# Altium PCB role after.PcbDoc (part 1 of 2)
Units mm, origin at the board's own origin, x right, y up, seen from the top; angles counter-clockwise.
Board outline 425.96 x 184.94 mm, 2 copper layers (Top Layer, Bottom Layer); 206 components, 164 nets, 532 pads, 4 vias.
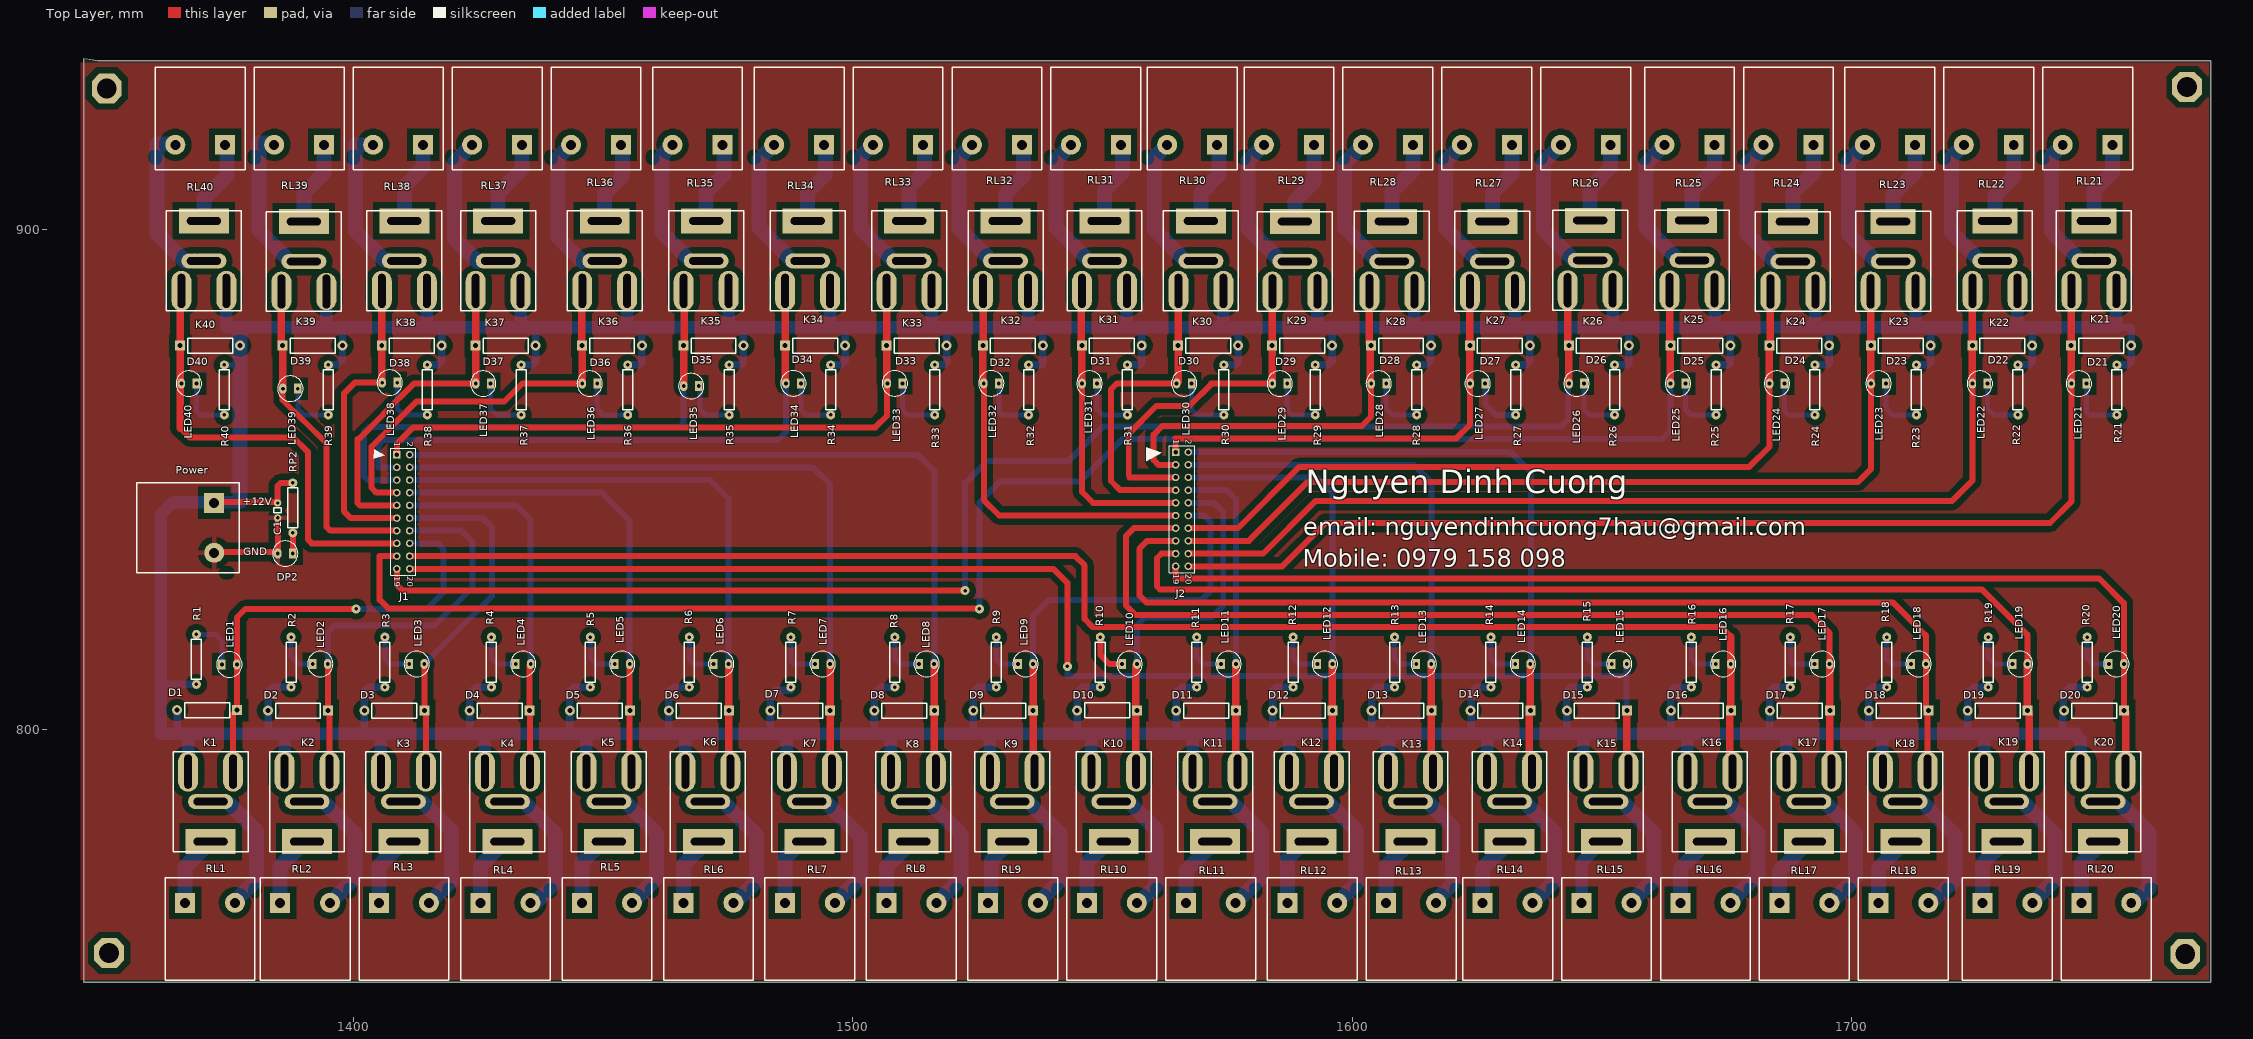
[diagram p0: Top Layer view]
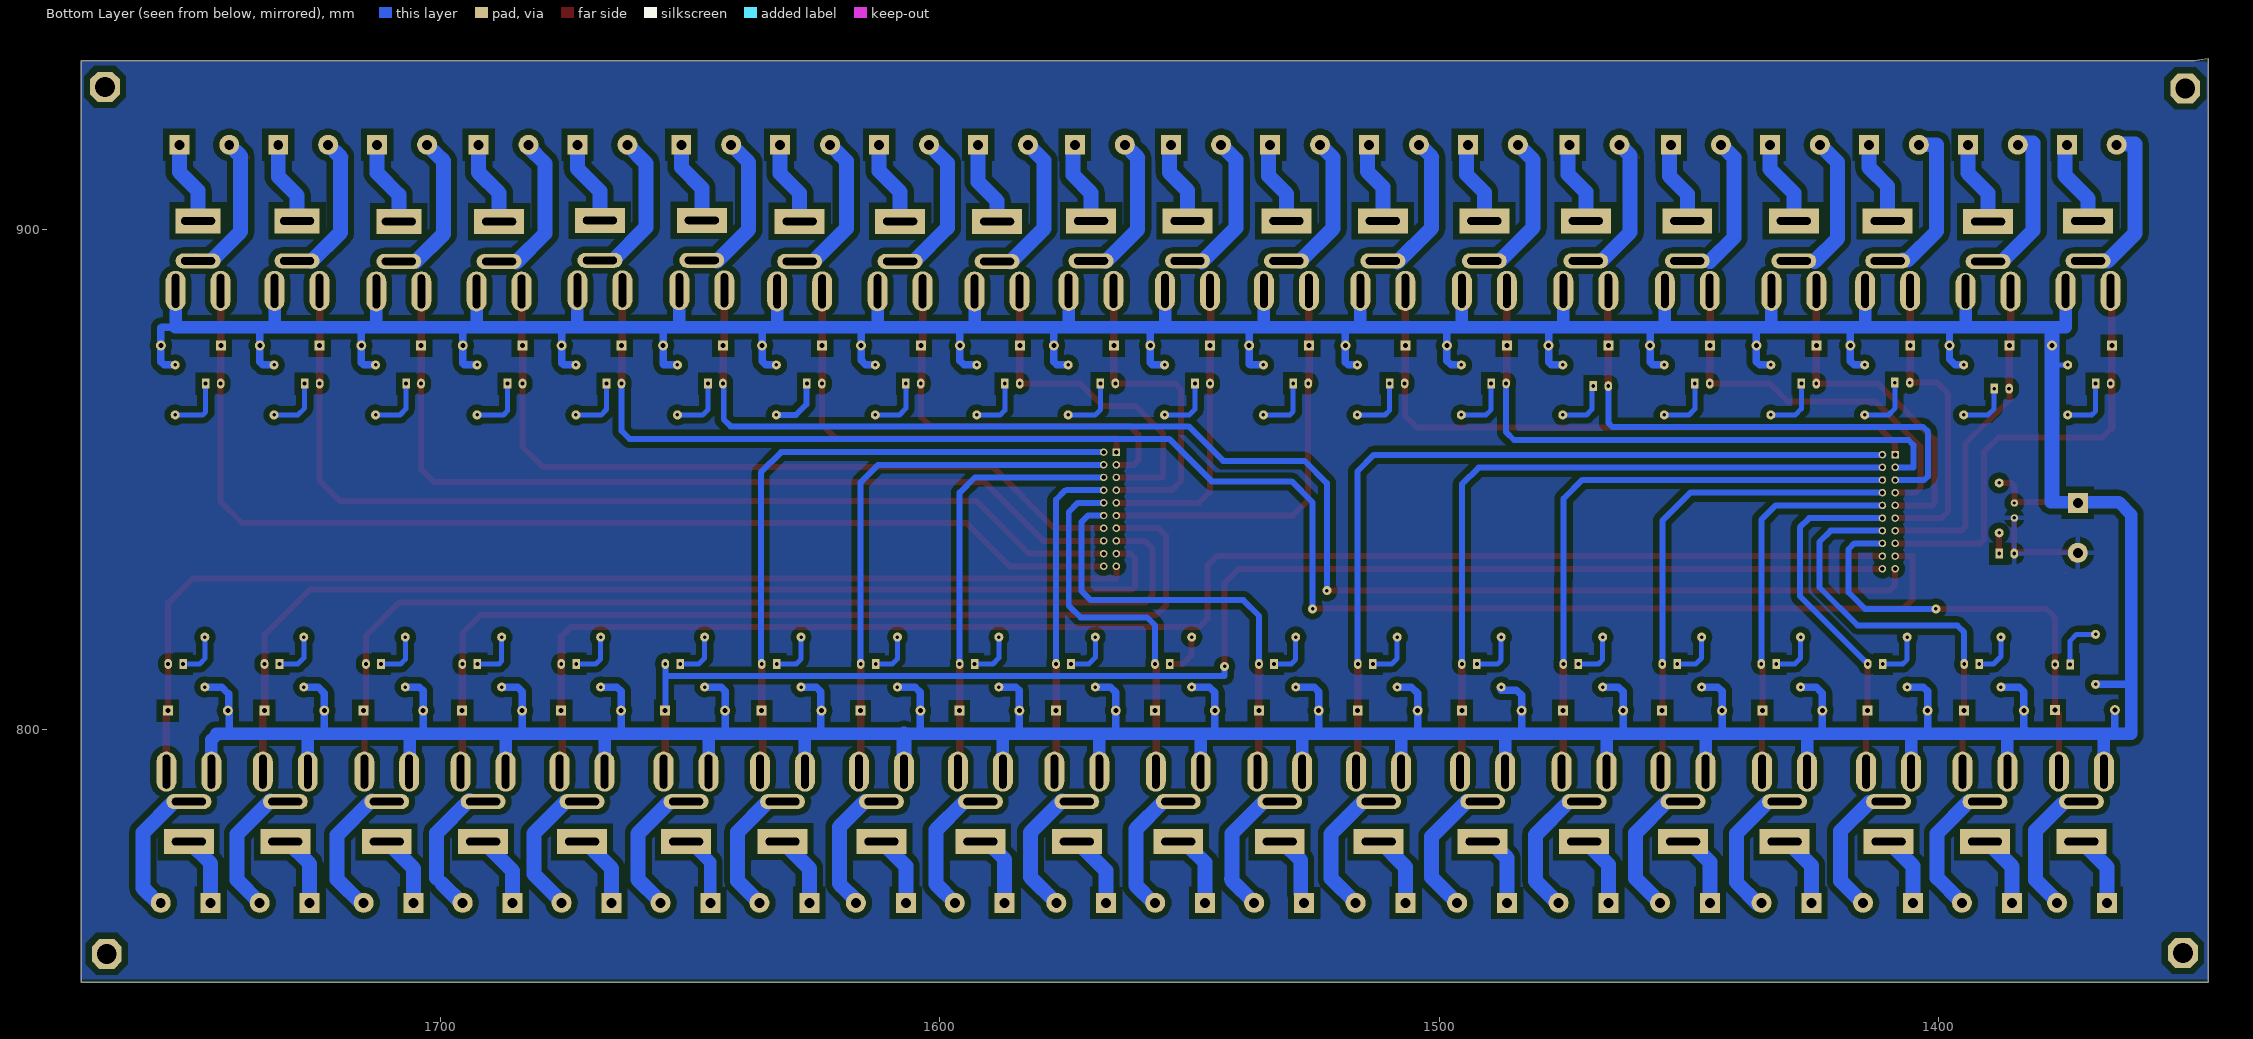
[diagram p1: Bottom Layer view, seen from below]

## Layer stack, top to bottom
Top Layer: signal copper 0.0356
Dielectric: dielectric 0.32, FR-4, Dk 4.8
Bottom Layer: signal copper 0.0356

## Board outline
1348.765,933.831 1771.955,933.831 1771.955,749.351 1345.997,749.351 1345.997,934.288

## Design rules (kind name [scope] priority, off if disabled: settings)
Clearance [All] p1: gap=1.2
ComponentClearance [All] p1: gap=0.254 collisioncheckmode=3 verticalgap=0.254
PlaneClearance [All] p1: clearance=1.2
PlaneConnect [All] p1: planeconnectstyle=Relief reliefexpansion=1 reliefentries=4 reliefconductorwidth=1 reliefairgap=1
PolygonConnect [All] p1: connectstyle=Relief reliefconductorwidth=1 reliefentries=4 polygonreliefangle="90 Angle"
RoutingVias [All] p1: holewidth=0.711 width=1.27 viastyle="Through Hole" minholewidth=0.711 minwidth=1.27 maxholewidth=0.711 maxwidth=1.27
SolderMaskExpansion [All] p1: expansion=0.102
TestPointUsage [All] p1: valid=0 allowmultiple=FALSE
Testpoint [All] p1: side=7 testpointundercomponent=TRUE minsize=1.016 maxsize=2.54 preferedsize=1.524 minholesize=0 maxholesize=1.016 preferedholesize=0.813 testpointgrid=0.025 style=1021 order=0-112345678
Width [All] p1: maxlimit=1.2 minlimit=1.2 preferedwidth=1.2
16 further rules are at their usual default settings.

## Components (designator, comment, footprint, x,y, rotation, side; value= is the part's Value field where it differs from the comment)
C1 "Cap" tu_gom 1384.808,843.28 r270 top
D1 "Diode" D_1A 1376.68,803.808 r180 top
D2 "Diode" D_1A 1394.884,803.702 r180 top
D3 "Diode" D_1A 1414.188,803.702 r180 top
D4 "Diode" D_1A 1435.266,803.702 r180 top
D5 "Diode" D_1A 1455.336,803.702 r180 top
D6 "Diode" D_1A 1475.148,803.702 r180 top
D7 "Diode" D_1A 1495.468,803.702 r180 top
D8 "Diode" D_1A 1516.296,803.702 r180 top
D9 "Diode" D_1A 1536.108,803.702 r180 top
D10 "Diode" D_1A 1556.92,803.732 r180 top
D11 "Diode" D_1A 1576.748,803.702 r180 top
D12 "Diode" D_1A 1596.052,803.702 r180 top
D13 "Diode" D_1A 1615.864,803.702 r180 top
D14 "Diode" D_1A 1635.676,803.702 r180 top
D15 "Diode" D_1A 1654.98,803.702 r180 top
D16 "Diode" D_1A 1675.808,803.702 r180 top
D17 "Diode" D_1A 1695.62,803.702 r180 top
D18 "Diode" D_1A 1715.432,803.702 r180 top
D19 "Diode" D_1A 1735.244,803.702 r180 top
D20 "Diode" D_1A 1754.548,803.702 r180 top
D21 "Diode" D_1A 1743.964,876.808 r0 top
D22 "Diode" D_1A 1724.152,876.808 r0 top
D23 "Diode" D_1A 1703.832,876.808 r0 top
D24 "Diode" D_1A 1683.512,876.808 r0 top
D25 "Diode" D_1A 1663.7,876.808 r0 top
D26 "Diode" D_1A 1643.38,876.808 r0 top
D27 "Diode" D_1A 1623.568,876.808 r0 top
D28 "Diode" D_1A 1603.756,876.808 r0 top
D29 "Diode" D_1A 1583.944,876.808 r0 top
D30 "Diode" D_1A 1565.148,876.808 r0 top
D31 "Diode" D_1A 1545.844,876.808 r0 top
D32 "Diode" D_1A 1526.032,876.808 r0 top
D33 "Diode" D_1A 1506.76,876.808 r0 top
D34 "Diode" D_1A 1486.44,876.808 r0 top
D35 "Diode" D_1A 1466.088,876.808 r0 top
D36 "Diode" D_1A 1445.768,876.808 r0 top
D37 "Diode" D_1A 1424.464,876.808 r0 top
D38 "Diode" D_1A 1405.66,876.808 r0 top
D39 "Diode" D_1A 1385.8,876.808 r0 top
D40 "Diode" D_1A 1365.278,876.808 r0 top
DP2 "LED0" LED_3 1386.84,835.152 r180 top
J1 "Header 10X2" HDR2X10 1408.684,854.964 r270 top (schematic designator M1)
J2 "Header 10X2" HDR2X10 1564.64,855.472 r270 top (schematic designator M2)
K1 "Relay-SPST" ROLE12V_JP#1 1366.886,789.988 r0 top
K2 "Relay-SPST" ROLE12V_JP#1 1386.19,789.988 r0 top
K3 "Relay-SPST" ROLE12V_JP#1 1405.494,789.988 r0 top
K4 "Relay-SPST" ROLE12V_JP#1 1426.322,789.988 r0 top
K5 "Relay-SPST" ROLE12V_JP#1 1446.642,789.988 r0 top
K6 "Relay-SPST" ROLE12V_JP#1 1466.454,789.988 r0 top
K7 "Relay-SPST" ROLE12V_JP#1 1486.774,789.988 r0 top
K8 "Relay-SPST" ROLE12V_JP#1 1507.602,789.988 r0 top
K9 "Relay-SPST" ROLE12V_JP#1 1527.414,789.988 r0 top
K10 "Relay-SPST" ROLE12V_JP#1 1547.734,789.988 r0 top
K11 "Relay-SPST" ROLE12V_JP#1 1568.054,789.988 r0 top
K12 "Relay-SPST" ROLE12V_JP#1 1587.358,789.988 r0 top
K13 "Relay-SPST" ROLE12V_JP#1 1607.17,789.988 r0 top
K14 "Relay-SPST" ROLE12V_JP#1 1626.982,789.988 r0 top
K15 "Relay-SPST" ROLE12V_JP#1 1646.286,789.988 r0 top
K16 "Relay-SPST" ROLE12V_JP#1 1667.114,789.988 r0 top
K17 "Relay-SPST" ROLE12V_JP#1 1686.926,789.988 r0 top
K18 "Relay-SPST" ROLE12V_JP#1 1706.23,789.988 r0 top
K19 "Relay-SPST" ROLE12V_JP#1 1726.55,789.988 r0 top
K20 "Relay-SPST" ROLE12V_JP#1 1745.854,789.988 r0 top
K21 "Relay-SPST" ROLE12V_JP#2 1753.006,889.258 r180 top
K22 "Relay-SPST" ROLE12V_JP#2 1733.194,889.258 r180 top
K23 "Relay-SPST" ROLE12V_JP#2 1712.818,889.152 r180 top
K24 "Relay-SPST" ROLE12V_JP#1 1692.726,889.136 r180 top
K25 "Relay-SPST" ROLE12V_JP#1 1672.538,889.378 r180 top
K26 "Relay-SPST" ROLE12V_JP#1 1652.14,889.386 r180 top
K27 "Relay-SPST" ROLE12V_JP#1 1632.54,889.16 r180 top
K28 "Relay-SPST" ROLE12V_JP#1 1612.426,889.174 r180 top
K29 "Relay-SPST" ROLE12V_JP#1 1593.01,889.144 r180 top
K30 "Relay-SPST" ROLE12V_JP#1 1574.19,889.258 r180 top
K31 "Relay-SPST" ROLE12V_JP#1 1554.886,889.258 r180 top
K32 "Relay-SPST" ROLE12V_JP#1 1535.074,889.258 r180 top
K33 "Relay-SPST" ROLE12V_JP#1 1515.77,889.258 r180 top
K34 "Relay-SPST" ROLE12V_JP#1 1495.45,889.258 r180 top
K35 "Relay-SPST" ROLE12V_JP#1 1475.13,889.258 r180 top
K36 "Relay-SPST" ROLE12V_JP#1 1454.81,889.258 r180 top
K37 "Relay-SPST" ROLE12V_JP#1 1433.474,889.258 r180 top
K38 "Relay-SPST" ROLE12V_JP#1 1414.678,889.258 r180 top
K39 "Relay-SPST" ROLE12V_JP#3 1394.568,889.136 r180 top
K40 "Relay-SPST" ROLE12V_JP#1 1374.546,889.258 r180 top
LED1 "LED0" LED_3 1374.648,812.952 r0 top
LED2 "LED0" LED_3 1392.852,813.051 r0 top
LED3 "LED0" LED_3 1412.156,813.051 r0 top
LED4 "LED0" LED_3 1433.492,813.051 r0 top
LED5 "LED0" LED_3 1453.304,813.051 r0 top
LED6 "LED0" LED_3 1473.116,813.051 r0 top
LED7 "LED0" LED_3 1493.436,813.051 r0 top
LED8 "LED0" LED_3 1514.264,813.051 r0 top
LED9 "LED0" LED_3 1534.076,813.051 r0 top
LED10 "LED0" LED_3 1554.904,813.051 r0 top
LED11 "LED0" LED_3 1574.716,813.051 r0 top
LED12 "LED0" LED_3 1594.02,813.051 r0 top
LED13 "LED0" LED_3 1613.832,813.051 r0 top
LED14 "LED0" LED_3 1633.644,813.051 r0 top
LED15 "LED0" LED_3 1652.948,813.051 r0 top
LED16 "LED0" LED_3 1673.776,813.051 r0 top
LED17 "LED0" LED_3 1693.588,813.051 r0 top
LED18 "LED0" LED_3 1712.892,813.051 r0 top
LED19 "LED0" LED_3 1733.212,813.051 r0 top
LED20 "LED0" LED_3 1752.516,813.051 r0 top
LED21 "LED0" LED_3 1745.996,869.188 r180 top
LED22 "LED0" LED_3 1726.184,869.188 r180 top
LED23 "LED0" LED_3 1705.864,869.188 r180 top
LED24 "LED0" LED_3 1685.544,869.188 r180 top
LED25 "LED0" LED_3 1665.732,869.188 r180 top
LED26 "LED0" LED_3 1645.412,869.188 r180 top
LED27 "LED0" LED_3 1625.6,869.188 r180 top
LED28 "LED0" LED_3 1605.788,869.188 r180 top
LED29 "LED0" LED_3 1585.976,869.188 r180 top
LED30 "LED0" LED_3 1566.82,869.238 r180 top
LED31 "LED0" LED_3 1547.876,869.188 r180 top
LED32 "LED0" LED_3 1528.212,869.238 r180 top
LED33 "LED0" LED_3 1508.908,869.238 r180 top
LED34 "LED0" LED_3 1488.588,869.238 r180 top
LED35 "LED0" LED_3 1468.12,868.68 r180 top
LED36 "LED0" LED_3 1447.8,869.188 r180 top
LED37 "LED0" LED_3 1426.464,869.188 r180 top
LED38 "LED0" LED_3 1407.744,869.378 r180 top
LED39 "LED0" LED_3 1387.856,868.172 r180 top
LED40 "LED0" LED_3 1367.536,869.188 r180 top
Power "Header 2" Header_nguon_20A 1372.108,845.312 r270 top
R1 "Res3" R_Nor 1368.552,813.968 r90 top
R2 "Res3" R_Nor 1387.492,813.431 r90 top
R3 "Res3" R_Nor 1406.288,813.431 r90 top
R4 "Res3" R_Nor 1427.624,813.431 r90 top
R5 "Res3" R_Nor 1447.436,813.431 r90 top
R6 "Res3" R_Nor 1467.248,813.431 r90 top
R7 "Res3" R_Nor 1487.568,813.431 r90 top
R8 "Res3" R_Nor 1508.396,813.431 r90 top
R9 "Res3" R_Nor 1528.716,813.431 r90 top
R10 "Res3" R_Nor 1549.544,813.431 r90 top
R11 "Res3" R_Nor 1568.848,813.431 r90 top
R12 "Res3" R_Nor 1588.152,813.431 r90 top
R13 "Res3" R_Nor 1608.472,813.431 r90 top
R14 "Res3" R_Nor 1627.776,813.431 r90 top
R15 "Res3" R_Nor 1647.08,813.431 r90 top
R16 "Res3" R_Nor 1667.908,813.431 r90 top
R17 "Res3" R_Nor 1687.72,813.431 r90 top
R18 "Res3" R_Nor 1707.024,813.431 r90 top
R19 "Res3" R_Nor 1727.344,813.431 r90 top
R20 "Res3" R_Nor 1747.156,813.431 r90 top
R21 "Res3" R_Nor 1753.108,867.918 r270 top
R22 "Res3" R_Nor 1733.296,867.918 r270 top
R23 "Res3" R_Nor 1712.976,867.918 r270 top
R24 "Res3" R_Nor 1692.656,867.918 r270 top
R25 "Res3" R_Nor 1672.844,867.918 r270 top
R26 "Res3" R_Nor 1652.524,867.918 r270 top
R27 "Res3" R_Nor 1632.712,867.918 r270 top
R28 "Res3" R_Nor 1612.9,867.918 r270 top
R29 "Res3" R_Nor 1592.58,867.918 r270 top
R30 "Res3" R_Nor 1574.292,867.918 r270 top
R31 "Res3" R_Nor 1554.988,867.918 r270 top
R32 "Res3" R_Nor 1535.176,867.918 r270 top
R33 "Res3" R_Nor 1516.38,867.918 r270 top
R34 "Res3" R_Nor 1495.552,867.918 r270 top
R35 "Res3" R_Nor 1475.232,867.918 r270 top
R36 "Res3" R_Nor 1454.912,867.918 r270 top
R37 "Res3" R_Nor 1433.576,867.918 r270 top
R38 "Res3" R_Nor 1414.78,867.918 r270 top
R39 "Res3" R_Nor 1394.968,867.918 r270 top
R40 "Res3" R_Nor 1374.14,867.918 r270 top
RL1 "Header 2" Header_nguon_20A 1366.27,765.213 r0 top
RL2 "Header 2" Header_nguon_20A 1385.308,765.213 r0 top
RL3 "Header 2" Header_nguon_20A 1405.12,765.213 r0 top
RL4 "Header 2" Header_nguon_20A 1425.44,765.213 r0 top
RL5 "Header 2" Header_nguon_20A 1445.76,765.213 r0 top
RL6 "Header 2" Header_nguon_20A 1466.08,765.213 r0 top
RL7 "Header 2" Header_nguon_20A 1486.4,765.213 r0 top
RL8 "Header 2" Header_nguon_20A 1506.72,765.213 r0 top
RL9 "Header 2" Header_nguon_20A 1527.04,765.213 r0 top
RL10 "Header 2" Header_nguon_20A 1546.852,765.213 r0 top
RL11 "Header 2" Header_nguon_20A 1566.664,765.213 r0 top
RL12 "Header 2" Header_nguon_20A 1586.984,765.213 r0 top
RL13 "Header 2" Header_nguon_20A 1606.796,765.213 r0 top
RL14 "Header 2" Header_nguon_20A 1626.1,765.213 r0 top
RL15 "Header 2" Header_nguon_20A 1645.912,765.213 r0 top
RL16 "Header 2" Header_nguon_20A 1665.724,765.213 r0 top
RL17 "Header 2" Header_nguon_20A 1685.536,765.213 r0 top
RL18 "Header 2" Header_nguon_20A 1705.348,765.213 r0 top
RL19 "Header 2" Header_nguon_20A 1726.176,765.213 r0 top
RL20 "Header 2" Header_nguon_20A 1745.988,765.213 r0 top
RL21 "Header 2" Header_nguon_20A 1752.27,917.016 r180 top
RL22 "Header 2" Header_nguon_20A 1732.458,917.016 r180 top
RL23 "Header 2" Header_nguon_20A 1712.646,917.016 r180 top
RL24 "Header 2" Header_nguon_20A 1692.346,917.016 r180 top
RL25 "Header 2" Header_nguon_20A 1672.534,917.016 r180 top
RL26 "Header 2" Header_nguon_20A 1651.758,917.016 r180 top
RL27 "Header 2" Header_nguon_20A 1631.946,917.016 r180 top
RL28 "Header 2" Header_nguon_20A 1612.134,917.016 r180 top
RL29 "Header 2" Header_nguon_20A 1592.322,917.016 r180 top
RL30 "Header 2" Header_nguon_20A 1572.946,917.016 r180 top
RL31 "Header 2" Header_nguon_20A 1553.662,917.016 r180 top
RL32 "Header 2" Header_nguon_20A 1533.85,917.016 r180 top
RL33 "Header 2" Header_nguon_20A 1514.038,917.016 r180 top
RL34 "Header 2" Header_nguon_20A 1494.226,917.016 r180 top
RL35 "Header 2" Header_nguon_20A 1473.886,917.016 r180 top
RL36 "Header 2" Header_nguon_20A 1453.566,917.016 r180 top
RL37 "Header 2" Header_nguon_20A 1433.754,917.016 r180 top
RL38 "Header 2" Header_nguon_20A 1413.942,917.016 r180 top
RL39 "Header 2" Header_nguon_20A 1394.13,917.016 r180 top
RL40 "Header 2" Header_nguon_20A 1374.318,917.016 r180 top
RP2 "Res3" R_Nor 1387.856,844.296 r270 top (schematic designator Rp2)

## Footprints (in the part's own frame and the unit in brackets; to place one, negate y for a bottom-side part, rotate by r counter-clockwise, add the part's x,y. Pads: shape width x height; smd on the part's side, far side on the other; paste and mask are expansions set on the pad)
D_1A [mm]
  rect 2x2 hole 1: 1(0,0)
  round 2 hole 1: 2(12,0)
  silkscreen extent 1.5,-1.5 10.5,1.5
HDR2X10 [mm] "Connector; Header; 10x2 Position"
  rect 1.5x1.5 hole 0.9: 1(0,0)
  round 1.5 hole 0.9: 2(0,2.54) 3(2.54,0) 4(2.54,2.54) 5(5.08,0) 6(5.08,2.54) 7(7.62,0) 8(7.62,2.54) 9(10.16,0) 10(10.16,2.54) 11(12.7,0) 12(12.7,2.54) 13(15.24,0) 14(15.24,2.54) 15(17.78,0) 16(17.78,2.54) 17(20.32,0) 18(20.32,2.54) 19(22.86,0) 20(22.86,2.54)
  silkscreen extent -1.27,-1.27 24.13,3.81
Header_nguon_20A [mm]
  rect 4x4 hole 2: 1(0,0)
  round 4 hole 2: 2(10,0)
  Top Layer lines w0.254: 14,2.246 14,2.754
  silkscreen extent -4,-15.5 14,5
LED_3 [mm]
  rect 1.524x2 hole 0.762: 1(-1,0)
  oval 1.524x2 hole 0.762: 2(2,0)
  silkscreen extent -2.05,-2.55 3.05,2.55
R_Nor [mm]
  round 1.8 hole 0.7: 1(-5,0) 2(5,0)
  silkscreen extent -4,-1 4,1
ROLE12V_JP#1 [mm]
  rect 10x5 hole 1.5 slot 6.8 at 0 deg: 1(4.5,-12.5)
  oval 9x3 hole 1.5 slot 6.8 at 0 deg: 2(4.5,-4.5)
  oval 4x8 hole 1.5 slot 6.8 at 90 deg: 3(0,1.5) 4(9,1.5)
  silkscreen extent -3,-14.5 12,5.5
ROLE12V_JP#2 [mm]
  rect 9x5 hole 1.5 slot 6.8 at 0 deg: 1(4.5,-12.5)
  oval 9x3 hole 1.5 slot 6.8 at 0 deg: 2(4.5,-4.5)
  oval 4x8 hole 1.5 slot 6.8 at 90 deg: 3(0,1.5) 4(9,1.5)
  silkscreen extent -3,-14.5 12,5.5
ROLE12V_JP#3 [mm]
  rect 10x5 hole 1.5 slot 6.8 at 0 deg: 1(4.5,-12.5)
  oval 9x3 hole 1.5 slot 6.8 at 0 deg: 2(4.5,-4.5)
  oval 4x7.5 hole 1.5 slot 6.8 at 90 deg: 3(0,1.5)
  oval 4x8 hole 1.5 slot 6.8 at 90 deg: 4(9,1.5)
  silkscreen extent -3,-14.5 12,5.5
tu_gom [mm]
  round 1.5 hole 0.7: 1(-2,0) 2(1,0)
  silkscreen extent -1,-0.75 0,0.75

## Part data
C1: "Capacitor"
D1 D2 D3 D4 D5 D6 D7 D8 D9 D10 D11 D12 D13 D14 D15 D16 D17 D18 D19 D20 D21 D22 D23 D24 D25 D26 D27 D28 D29 D30 D31 D32 D33 D34 D35 D36 D37 D38 D39 D40: "Default Diode"
DP2 LED1 LED2 LED3 LED4 LED5 LED6 LED7 LED8 LED9 LED10 LED11 LED12 LED13 LED14 LED15 LED16 LED17 LED18 LED19 LED20 LED21 LED22 LED23 LED24 LED25 LED26 LED27 LED28 LED29 LED30 LED31 LED32 LED33 LED34 LED35 LED36 LED37 LED38 LED39 LED40: "Typical INFRARED GaAs LED"
J1 J2: "Header, 10-Pin, Dual row"
K1 K2 K3 K4 K5 K6 K7 K8 K9 K10 K11 K12 K13 K14 K15 K16 K17 K18 K19 K20 K21 K22 K23 K24 K25 K26 K27 K28 K29 K30 K31 K32 K33 K34 K35 K36 K37 K38 K39 K40: "Single-Pole Single-Throw Relay"
Power RL1 RL2 RL3 RL4 RL5 RL6 RL7 RL8 RL9 RL10 RL11 RL12 RL13 RL14 RL15 RL16 RL17 RL18 RL19 RL20 RL21 RL22 RL23 RL24 RL25 RL26 RL27 RL28 RL29 RL30 RL31 RL32 RL33 RL34 RL35 RL36 RL37 RL38 RL39 RL40: "Header, 2-Pin"
R1 R2 R3 R4 R5 R6 R7 R8 R9 R10 R11 R12 R13 R14 R15 R16 R17 R18 R19 R20 R21 R22 R23 R24 R25 R26 R27 R28 R29 R30 R31 R32 R33 R34 R35 R36 R37 R38 R39 R40 RP2: "Resistor"

## Free pads (board coordinates)
  oct 6x6 hole 4: 0(1350.594,928.294) 0(1351.077,755.168) 0(1766.798,754.99) 0(1767.154,928.624)

## Via types
v1: diameter 1.8, hole 0.711, Top Layer to Bottom Layer, 4 vias

## Nets (pads, with @x,y where several pads share a name; then routed paths per layer and width w, separated by ;. In a path a pad name is that pad's centre, name@x,y a point inside that pad or via, vN(x,y) a via of type N, cw(c..) or ccw(c..) an arc to the next point about the centre after c; other vN are vias at no path point)
+12V: C1.1 D1.2 D2.2 D3.2 D4.2 D5.2 D6.2 D7.2 D8.2 D9.2 D10.2 D11.2 D12.2 D13.2 D14.2 D15.2 D16.2 D17.2 D18.2 D19.2 D20.2 D21.2 D22.2 D23.2 D24.2 D25.2 D26.2 D27.2 D28.2 D29.2 D30.2 D31.2 D32.2 D33.2 D34.2 D35.2 D36.2 D37.2 D38.2 D39.2 D40.2 K1.3 K2.3 K3.3 K4.3 K5.3 K6.3 K7.3 K8.3 K9.3 K10.3 K11.3 K12.3 K13.3 K14.3 K15.3 K16.3 K17.3 K18.3 K19.3 K20.3 K21.3 K22.3 K23.3 K24.3 K25.3 K26.3 K27.3 K28.3 K29.3 K30.3 K31.3 K32.3 K33.3 K34.3 K35.3 K36.3 K37.3 K38.3 K39.3 K40.3 Power.1 R1.1 R2.1 R3.1 R4.1 R5.1 R6.1 R7.1 R8.1 R9.1 R10.1 R11.1 R12.1 R13.1 R14.1 R15.1 R16.1 R17.1 R18.1 R19.1 R20.1 R21.1 R22.1 R23.1 R24.1 R25.1 R26.1 R27.1 R28.1 R29.1 R30.1 R31.1 R32.1 R33.1 R34.1 R35.1 R36.1 R37.1 R38.1 R39.1 R40.1 RP2.1 | length 1658.5
  Top Layer w1.2: Power.1@1372.616,845.464 1384.808,845.464 1384.808,848.716 1385.388,849.296 RP2.1@1387.856,849.296
  Bottom Layer w1: R40.1@1374.14,872.918 1377.27,872.918 1377.274,872.918 1377.278,872.922
  Bottom Layer w1.2: 1607.16,799.059 1607.17,799.048 ; 1755.817,880.5 1755.964,880.353
  Bottom Layer w1.5: 1360.932,808.969 1361.415,808.969 R1.1@1368.552,808.968 ; 1364.666,799.465 1364.68,799.479 D1.2@1364.68,803.808 ; 1377.239,880.161 1377.278,880.122 ; 1382.37,799.694 1382.884,800.208 D2.2@1382.884,803.702 1382.884,807.447 1383.868,808.431 R2.1@1387.492,808.431 ; R39.1@1394.968,872.918 1396.666,872.918 1397.8,874.052 D39.2@1397.8,876.808 ; D39.2@1397.813,877.024 D39.2@1397.8,876.808 ; 1397.889,880.5 1397.8,880.411 D39.2@1397.8,876.808 ; 1402.232,799.059 1402.188,799.103 D3.2@1402.188,803.702 1402.188,807.548 1403.07,808.431 R3.1@1406.288,808.431 ; R38.1@1414.78,872.918 1416.91,872.918 1417.66,873.668 D38.2@1417.66,876.808 1417.66,880.414 1417.574,880.5 ; 1423.391,799.059 1423.266,799.183 D4.2@1423.266,803.702 1423.266,807.189 1424.508,808.431 R4.1@1427.624,808.431 ; R37.1@1433.576,872.918 1435.782,872.918 1436.464,873.6 D37.2@1436.464,876.808 1436.464,880.457 1436.421,880.5 ; 1443.152,799.059 1443.336,799.243 D5.2@1443.336,803.702 1443.336,807.574 1444.193,808.431 R5.1@1447.436,808.431 ; R36.1@1454.912,872.918 1457.245,872.918 1457.768,873.441 D36.2@1457.768,876.808 1457.768,880.438 1457.706,880.5 ; 1463.167,799.567 1463.148,799.586 D6.2@1463.148,803.702 1463.148,807.472 1464.106,808.431 R6.1@1467.248,808.431 ; R35.1@1475.232,872.918 1477.54,872.918 1478.088,873.466 D35.2@1478.088,876.808 1478.088,880.387 1477.975,880.5 ; 1483.385,799.338 1483.468,799.42 D7.2@1483.468,803.702 1483.468,806.761 1484.51,807.803 1487.568,807.803 R7.1@1487.568,808.431 1487.771,808.228 R7.1@1487.78,808.228 ; R34.1@1495.552,872.918 1497.555,872.918 1498.44,873.803 D34.2@1498.44,876.808 1498.44,880.482 ; 1504.188,799.059 1504.296,799.166 D8.2@1504.296,803.702 1504.296,807.167 1505.559,808.431 R8.1@1508.396,808.431 ; R33.1@1516.38,872.918 1518.18,872.918 1518.76,873.498 D33.2@1518.76,876.808 1518.76,880.34 1518.92,880.5 ; 1524.076,799.059 1524.108,799.09 D9.2@1524.108,803.702 1524.108,807.498 1525.041,808.431 R9.1@1528.716,808.431 ; R32.1@1535.176,872.918 1537.865,872.918 1538.032,873.085 D32.2@1538.032,876.808 1538.032,880.003 1538.529,880.5 ; 1544.777,799.059 1544.92,799.201 D10.2@1544.92,803.732 1544.92,807.355 1545.996,808.431 R10.1@1549.544,808.431 ; R31.1@1554.988,872.918 1557.448,872.918 1557.844,873.314 D31.2@1557.844,876.808 1557.844,880.13 1558.214,880.5 ; 1564.767,799.338 1564.748,799.357 D11.2@1564.748,803.702 1564.748,807.345 1565.833,808.431 R11.1@1568.848,808.431 ; R30.1@1574.292,872.918 1576.523,872.918 1577.148,873.543 D30.2@1577.148,876.808 1577.148,880.283 1577.365,880.5 ; 1583.842,799.059 1584.052,799.268 D12.2@1584.052,803.702 1584.052,807.752 1584.731,808.431 R12.1@1588.152,808.431 ; R29.1@1592.58,872.918 1595.065,872.918 1595.944,873.797 D29.2@1595.944,876.808 1595.944,880.384 1596.06,880.5 ; 1603.959,799.338 1603.864,799.433 D13.2@1603.864,803.702 1603.864,807.345 1604.949,808.431 R13.1@1608.472,808.431 ; R28.1@1612.9,872.918 1614.827,872.918 1615.756,873.847 D28.2@1615.756,876.808 1615.756,880.359 1615.897,880.5 ; 1623.263,799.059 1623.822,799.617 1623.822,803.702 1623.822,807.491 1624.761,808.431 R14.1@1627.776,808.431 ; R27.1@1632.712,872.918 1634.842,872.918 1635.568,873.644 D27.2@1635.568,876.808 1635.568,880.41 1635.658,880.5 ; 1643.024,799.059 1642.98,799.103 D15.2@1642.98,803.702 1642.98,807.625 1643.786,808.431 R15.1@1647.08,808.431 ; R26.1@1652.524,872.918 1655.263,872.918 1655.38,873.035 D26.2@1655.38,876.808 1655.38,880.41 1655.47,880.5 ; 1663.725,799.795 1663.808,799.878 D16.2@1663.808,803.702 1663.808,807.548 1664.69,808.431 R16.1@1667.908,808.431 ; R25.1@1672.844,872.918 1675.329,872.918 1675.7,873.289 D25.2@1675.7,876.808 1675.7,880.401 1675.799,880.5 1676.146,880.847 ; 1683.944,799.795 1683.62,800.119 D17.2@1683.62,803.702 1683.62,807.523 1684.527,808.431 R17.1@1687.72,808.431 ; R24.1@1692.656,872.918 1695.167,872.918 1695.512,873.263 D24.2@1695.512,876.808 1695.512,880.41 1695.602,880.5 ; 1703.019,799.059 1703.432,799.471 D18.2@1703.432,803.702 1703.432,807.65 1704.212,808.431 R18.1@1707.024,808.431 ; R23.1@1712.976,872.918 1715.385,872.918 1715.832,873.365 D23.2@1715.832,876.808 1715.832,880.384 1715.948,880.5 ; 1723.365,799.567 1723.244,799.687 D19.2@1723.244,803.702 1723.244,807.218 1724.456,808.431 R19.1@1727.344,808.431 ; R22.1@1733.296,872.918 1735.527,872.918 1736.152,873.543 D22.2@1736.152,876.808 1736.152,880.435 ; 1742.44,799.059 1742.313,799.186 1742.313,803.702 1742.313,803.732 1742.415,803.835 1742.415,807.035 1743.811,808.431 R20.1@1747.156,808.431 ; R21.1@1753.108,872.918 1755.314,872.918 1755.964,873.568 D21.2@1755.964,876.808 1755.964,880.353 ; 1753.108,880.5 1755.817,880.5
  Bottom Layer w2.5: K1.3@1366.886,791.488 1366.886,799.018 1366.926,799.059 ; K40.3@1374.546,887.758 1374.546,880.5 1394.5,880.5 ; 1377.518,845.464 1372.108,845.464 1363.904,845.464 1361.415,842.975 1361.415,808.969 1361.415,799.059 1366.926,799.059 ; K2.3@1386.19,791.488 1386.19,798.82 1385.951,799.059 ; K39.3@1394.568,887.636 1394.568,880.568 1394.5,880.5 ; K3.3@1405.494,791.488 1405.494,798.464 1404.899,799.059 ; K38.3@1414.678,887.758 1414.678,880.678 1414.5,880.5 ; K4.3@1426.322,791.488 1426.322,799.023 1426.286,799.059 ; K37.3@1433.474,887.758 1433.474,881.224 1432.75,880.5 ; K5.3@1446.642,791.488 1446.642,798.794 1446.378,799.059 ; K36.3@1454.81,887.758 1454.81,880.94 1455.25,880.5 ; K6.3@1466.454,791.488 1466.454,798.84 1466.672,799.059 ; K35.3@1475.13,887.758 1475.13,880.63 1475,880.5 ; K7.3@1486.774,791.488 1486.774,798.972 1486.687,799.059 ; K34.3@1495.45,887.758 1495.45,880.8 1495.75,880.5 ; K8.3@1507.602,791.488 1507.602,799.048 1507.592,799.059 ; K33.3@1515.77,887.758 1515.77,880.73 1516,880.5 ; K9.3@1527.414,791.488 1527.414,798.845 1527.2,799.059 ; K32.3@1535.074,887.758 1535.074,880.574 1535,880.5 ; K10.3@1547.734,791.488 1547.734,798.845 1547.52,799.059 ; K31.3@1554.886,887.758 1554.886,880.886 1554.5,880.5 ; K11.3@1568.054,791.488 1568.054,798.997 1567.993,799.059 ; K30.3@1574.19,887.758 1574.19,880.81 1574.5,880.5 ; K12.3@1587.358,791.488 1587.358,798.82 1587.119,799.059 ; K29.3@1593.01,887.644 1593.01,880.74 1593.25,880.5 ; K28.3@1612.426,887.674 1612.426,880.676 1612.25,880.5 ; K14.3@1626.982,791.488 1626.982,798.616 1626.54,799.059 ; K27.3@1632.54,887.66 1632.54,880.96 1633,880.5 ; K15.3@1646.286,791.488 1646.286,798.947 1646.174,799.059 ; K26.3@1652.14,887.886 1652.14,880.61 1652.25,880.5 ; K16.3@1667.114,791.488 1667.114,798.769 1666.824,799.059 ; K25.3@1672.538,887.878 1672.538,880.962 1673,880.5 ; K17.3@1686.926,791.488 1686.926,798.769 1686.636,799.059 ; K24.3@1692.726,887.636 1692.726,880.774 1693,880.5 ; K18.3@1706.093,791.845 1706.093,798.881 1705.915,799.059 ; K23.3@1712.818,887.652 1712.818,880.682 1713,880.5 ; K19.3@1726.55,791.488 1726.55,798.566 1726.057,799.059 ; 1733.194,880.556 K22.3@1733.194,887.758 ; 1744.904,799.059 1744.65,799.059 ; K20.3@1746.047,791.286 1746.047,791.296 1745.854,791.488 1745.854,797.854 1744.65,799.059 ; 1753.006,881.163 K21.3@1753.006,887.758 ; 1753.108,880.5 1715.948,880.5 1713,880.5 ; 1366.926,799.059 1385.951,799.059 ; 1385.951,799.059 1402.232,799.059 1404.899,799.059 ; 1394.5,880.5 1397.889,880.5 1414.5,880.5 ; 1404.899,799.059 1423.391,799.059 1426.286,799.059 ; 1414.5,880.5 1417.574,880.5 1432.75,880.5 ; 1426.286,799.059 1443.152,799.059 1446.378,799.059 ; 1432.75,880.5 1436.421,880.5 1455.25,880.5 ; 1446.378,799.059 1466.672,799.059 ; 1455.25,880.5 1457.706,880.5 1475,880.5 ; 1466.672,799.059 1486.687,799.059 ; 1475,880.5 1477.975,880.5 1495.75,880.5 ; 1486.687,799.059 1504.188,799.059 1507.592,799.059 ; 1495.75,880.5 1516,880.5 ; 1507.592,799.059 1524.076,799.059 1527.2,799.059 ; 1516,880.5 1518.92,880.5 1535,880.5 ; 1527.2,799.059 1544.777,799.059 1547.52,799.059 ; 1535,880.5 1538.529,880.5 1554.5,880.5 ; 1547.52,799.059 1567.993,799.059 ; 1554.5,880.5 1558.214,880.5 1574.5,880.5 ; 1567.993,799.059 1583.842,799.059 1587.119,799.059 ; 1574.5,880.5 1577.365,880.5 1593.25,880.5 ; 1587.119,799.059 1607.16,799.059 1623.263,799.059 1626.54,799.059 ; 1593.25,880.5 1596.06,880.5 1612.25,880.5 ; 1612.25,880.5 1615.897,880.5 1633,880.5 ; 1626.54,799.059 1643.024,799.059 1646.174,799.059 ; 1633,880.5 1635.658,880.5 1652.25,880.5 ; 1646.174,799.059 1666.824,799.059 ; 1652.25,880.5 1655.47,880.5 1673,880.5 ; 1666.824,799.059 1686.636,799.059 ; 1673,880.5 1675.799,880.5 1693,880.5 ; 1686.636,799.059 1703.019,799.059 1705.915,799.059 ; 1693,880.5 1695.602,880.5 1713,880.5 ; 1705.915,799.059 1726.057,799.059 ; 1726.057,799.059 1742.44,799.059 1744.65,799.059
  Bottom Layer w3: 1377.239,845.685 1377.27,872.918 1377.275,876.808 1377.278,879.856 ; 1377.24,846.04 1377.278,872.922 ; K13.3@1607.17,791.488 1607.17,799.048
GND: C1.2 DP2.2 Power.2 | length 19.7
  Top Layer w1.2: Power.2@1372.337,835.464 DP2.2@1384.84,835.464 ; C1.2@1384.808,842.28 1384.84,842.248 DP2.2@1384.84,835.464 ; DP2.2@1384.84,835.152 DP2.2@1384.84,835.464 ; DP2.2@1384.884,835.464 DP2.2@1384.84,835.464
NetD19_1: D19.1 K19.4 LED19.2 | length 27.6
  Top Layer w1.2: LED19.2@1735.212,813.051 1735.212,818.932
  Top Layer w1.5: LED19.2@1735.212,813.051 1735.15,812.989 1735.15,803.885 1735.288,803.747 1735.55,803.485 K19.4@1735.55,791.488
NetDP2_1: DP2.1 RP2.2 | length 4.2
  Top Layer w1.2: DP2.1@1387.84,835.152 1387.856,835.168 RP2.2@1387.856,839.296
NetK1_1: K1.1 RL1.1 | length 14.5
  Bottom Layer w2.5: 1366.27,772.372 1366.27,772.465
  Bottom Layer w3: RL1.1@1366.27,765.213 1366.27,772.372 K1.1@1371.386,777.488
NetK1_2: K1.2 RL1.2 | length 23.9
  Bottom Layer w2.5: RL1.2@1376.07,765.327 RL1.2@1376.113,765.37
  Bottom Layer w3: K1.2@1375.118,785.101 1380.566,779.653 1380.566,769.823 RL1.2@1376.113,765.37
NetK2_1: K2.1 RL2.1 | length 14.2
  Bottom Layer w3: RL2.1@1385.308,765.213 1385.308,772.312 ; 1385.308,772.482 K2.1@1390.294,777.469
NetK2_2: K2.2 RL2.2 | length 24.7
  Bottom Layer w3: K2.2@1393.876,785.546 1400.277,779.145 1400.277,770.23 RL2.2@1395.527,765.48
NetK3_1: K3.1 RL3.1 | length 14.2
  Bottom Layer w3: RL3.1@1405.12,765.213 1405.12,772.516 ; 1405.12,772.614 K3.1@1409.994,777.488
NetK3_2: K3.2 RL3.2 | length 24.6
  Bottom Layer w2.5: RL3.2@1415.009,764.997 RL3.2@1415.172,765.161
  Bottom Layer w3: K3.2@1413.878,785.33 1419.581,779.628 1419.581,769.569 RL3.2@1415.172,765.161
NetK4_1: K4.1 RL4.1 | length 13.8
  Bottom Layer w3: RL4.1@1425.44,765.213 1425.44,772.49 ; 1425.44,772.66 K4.1@1430.071,777.291
NetK4_2: K4.2 RL4.2 | length 24.6
  Bottom Layer w3: K4.2@1434.313,785.241 1440.485,779.069 1440.485,769.341 RL4.2@1436.141,764.997
NetK5_1: K5.1 RL5.1 | length 14.8
  Bottom Layer w2.5: K5.1@1450.522,778.108 K5.1@1450.543,778.129
  Bottom Layer w3: RL5.1@1445.76,765.213 1445.76,773.201 ; 1445.76,773.346 K5.1@1450.522,778.108
NetK5_2: K5.2 RL5.2 | length 25
  Bottom Layer w3: K5.2@1454.302,785.571 1460.652,779.221 1460.652,770.106 RL5.2@1455.76,765.213
NetK6_1: K6.1 RL6.1 | length 13.8
  Bottom Layer w3: RL6.1@1466.08,765.213 1466.08,772.795 ; 1466.08,772.863 K6.1@1470.508,777.291
NetK6_2: K6.2 RL6.2 | length 25.6
  Bottom Layer w2.5: RL6.2@1475.765,764.642 RL6.2@1476.209,765.085
  Bottom Layer w3: K6.2@1474.038,785.47 1480.718,778.789 1480.718,769.595 RL6.2@1476.208,765.085
NetK7_1: K7.1 RL7.1 | length 13.8
  Bottom Layer w3: RL7.1@1486.4,765.213 1486.4,774.209 K7.1@1489.812,777.621
NetK7_2: K7.2 RL7.2 | length 25.3
  Bottom Layer w3: K7.2@1494.511,785.47 1501.496,778.485 1501.496,770.309 RL7.2@1496.4,765.213
NetK8_1: K8.1 RL8.1 | length 14.4
  Bottom Layer w3: RL8.1@1506.72,765.213 1506.72,772.381 ; 1506.72,772.439 1506.72,772.381 ; K8.1@1511.808,777.469 1506.72,772.381
NetK8_2: K8.2 RL8.2 | length 25.1
  Bottom Layer w3: K8.2@1515.085,785.597 1521.638,779.043 1521.638,770.131 RL8.2@1516.72,765.213
NetK9_1: K9.1 RL9.1 | length 12.2
  Bottom Layer w2.5: RL9.1@1527.708,764.642 RL9.1@1527.708,765.213
  Bottom Layer w3: RL9.1@1527.708,767.131 1527.708,773.735 K9.1@1531.264,777.291
NetK9_2: K9.2 RL9.2 | length 25.3
  Bottom Layer w2.5: K9.2@1535.1,785.47 K9.2@1535.1,785.488 ; 1541.501,769.674 1541.867,770.041
  Bottom Layer w3: K9.2@1535.1,785.47 1541.501,779.069 1541.501,769.674 RL9.2@1537.04,765.213
NetK10_1: K10.1 RL10.1 | length 13.3
  Bottom Layer w3: RL10.1@1546.852,765.213 1546.852,773.244 ; 1546.852,773.252 1546.852,773.244 ; K10.1@1550.568,776.961 1546.852,773.244
NetK10_2: K10.2 RL10.2 | length 23.8
  Bottom Layer w2.5: 1560.703,768.655 1560.703,768.706
  Bottom Layer w3: K10.2@1555.267,785.444 1560.703,780.009 1560.703,768.706 RL10.2@1557.325,765.327
NetK11_1: K11.1 RL11.1 | length 14.8
  Bottom Layer w3: RL11.1@1566.664,765.213 1566.664,771.598 ; 1566.664,771.652 1566.664,771.598 ; K11.1@1572.554,777.488 1566.664,771.598
NetK11_2: K11.2 RL11.2 | length 25.1
  Bottom Layer w3: K11.2@1575.613,785.571 1581.861,779.323 1581.861,770.41 RL11.2@1576.664,765.213
NetK12_1: K12.1 RL12.1 | length 13.7
  Bottom Layer w3: RL12.1@1586.984,765.404 1586.984,773.93 K12.1@1590.675,777.621
NetK12_2: K12.2 RL12.2 | length 23.9
  Bottom Layer w3: K12.2@1595.272,785.266 1600.733,779.805 1600.733,768.963 RL12.2@1596.984,765.213
NetK13_1: K13.1 RL13.1 | length 14.1
  Bottom Layer w3: RL13.1@1606.796,765.213 1606.796,772.465 ; 1606.796,772.614 K13.1@1611.67,777.488
NetK13_2: K13.2 RL13.2 | length 22.9
  Bottom Layer w3: K13.2@1615.008,785.495 1620.114,780.39 1620.114,769.264 ; RL13.2@1616.888,765.835 1620.114,769.061
NetK14_1: K14.1 RL14.1 | length 14.4
  Bottom Layer w3: RL14.1@1626.1,765.213 1626.1,772.008 ; 1626.1,772.106 K14.1@1631.482,777.488
NetK14_2: K14.2 RL14.2 | length 24.2
  Bottom Layer w3: K14.2@1634.668,785.215 1640.51,779.374 1640.51,769.623 RL14.2@1636.1,765.213
NetK15_1: K15.1 RL15.1 | length 13.6
  Bottom Layer w2.5: RL15.1@1645.912,765.213 1645.912,773.125 ; 1645.912,773.295 K15.1@1649.908,777.291
NetK15_2: K15.2 RL15.2 | length 23.6
  Bottom Layer w3: K15.2@1654.302,785.215 1660.398,779.12 1660.398,769.899 RL15.2@1656.334,765.835
NetK16_1: K16.1 RL16.1 | length 14.5
  Bottom Layer w3: RL16.1@1665.724,765.213 1665.724,772.109 ; 1665.724,772.127 K16.1@1671.066,777.469
NetK16_2: K16.2 RL16.2 | length 24.1
  Bottom Layer w3: K16.2@1674.99,785.406 1681.277,779.12 1681.277,770.966 RL16.2@1676.298,765.988
NetK17_1: K17.1 RL17.1 | length 14.4
  Bottom Layer w3: RL17.1@1685.536,765.213 1685.536,771.601 ; 1685.536,771.619 K17.1@1691.208,777.291
NetK17_2: K17.2 RL17.2 | length 25.9
  Bottom Layer w2.5: RL17.2@1695.425,764.819 RL17.2@1695.677,765.072 ; 1699.666,769.01 1699.666,769.061 1700.784,770.179
  Bottom Layer w3: K17.2@1694.205,785.749 1700.784,779.17 1700.784,770.179 ; RL17.2@1695.677,765.072 1699.666,769.061